# Altium PCB PCB3.PcbDoc
Units mil, origin at the board's own origin, x right, y up, seen from the top; angles counter-clockwise.
Board outline 730 x 1700 mil, 6 copper layers (Top Layer, Signal Layer Top, VCC, GND, Signal Layer Bottom, Bottom Layer), stack 32.112 mil thick; 25 components, 40 nets, 163 pads, 79 vias.
Unrouted connection lines stored in the file: 5.
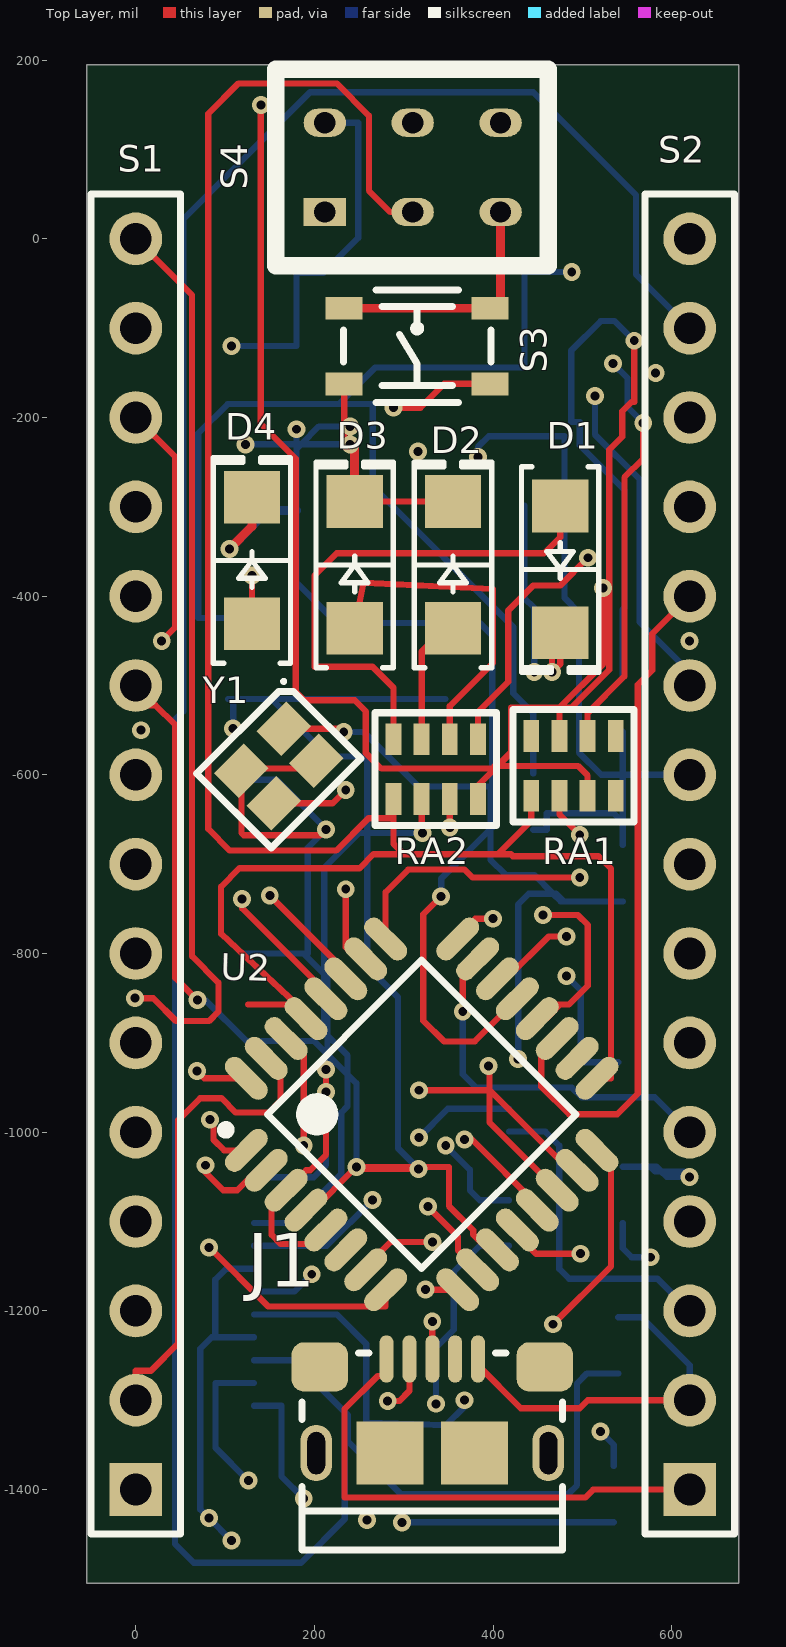
[diagram p0: Top Layer view]
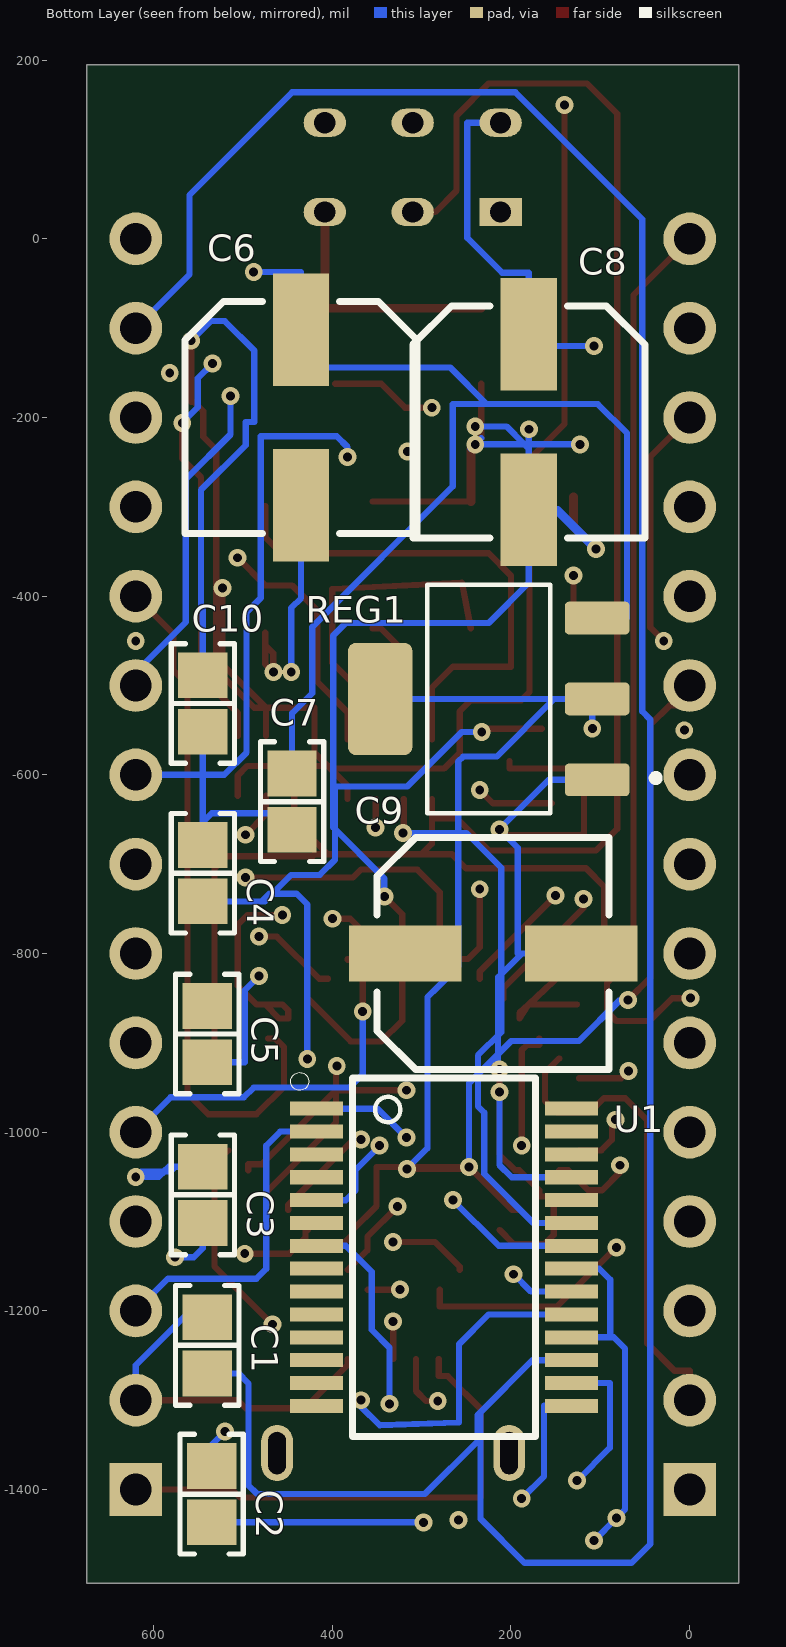
[diagram p1: Bottom Layer view, seen from below]
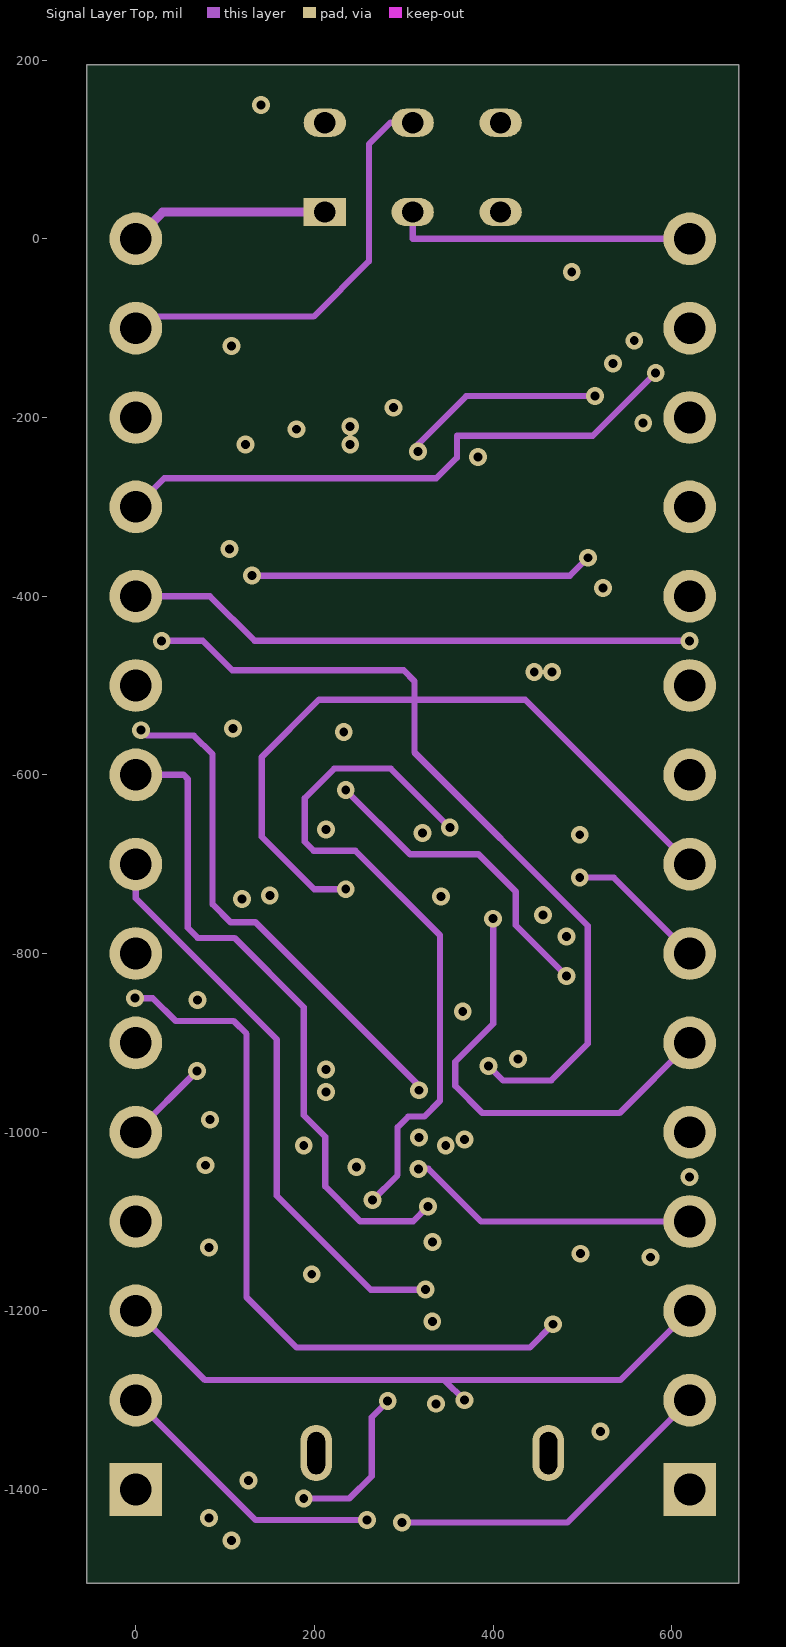
[diagram p2: Signal Layer Top]
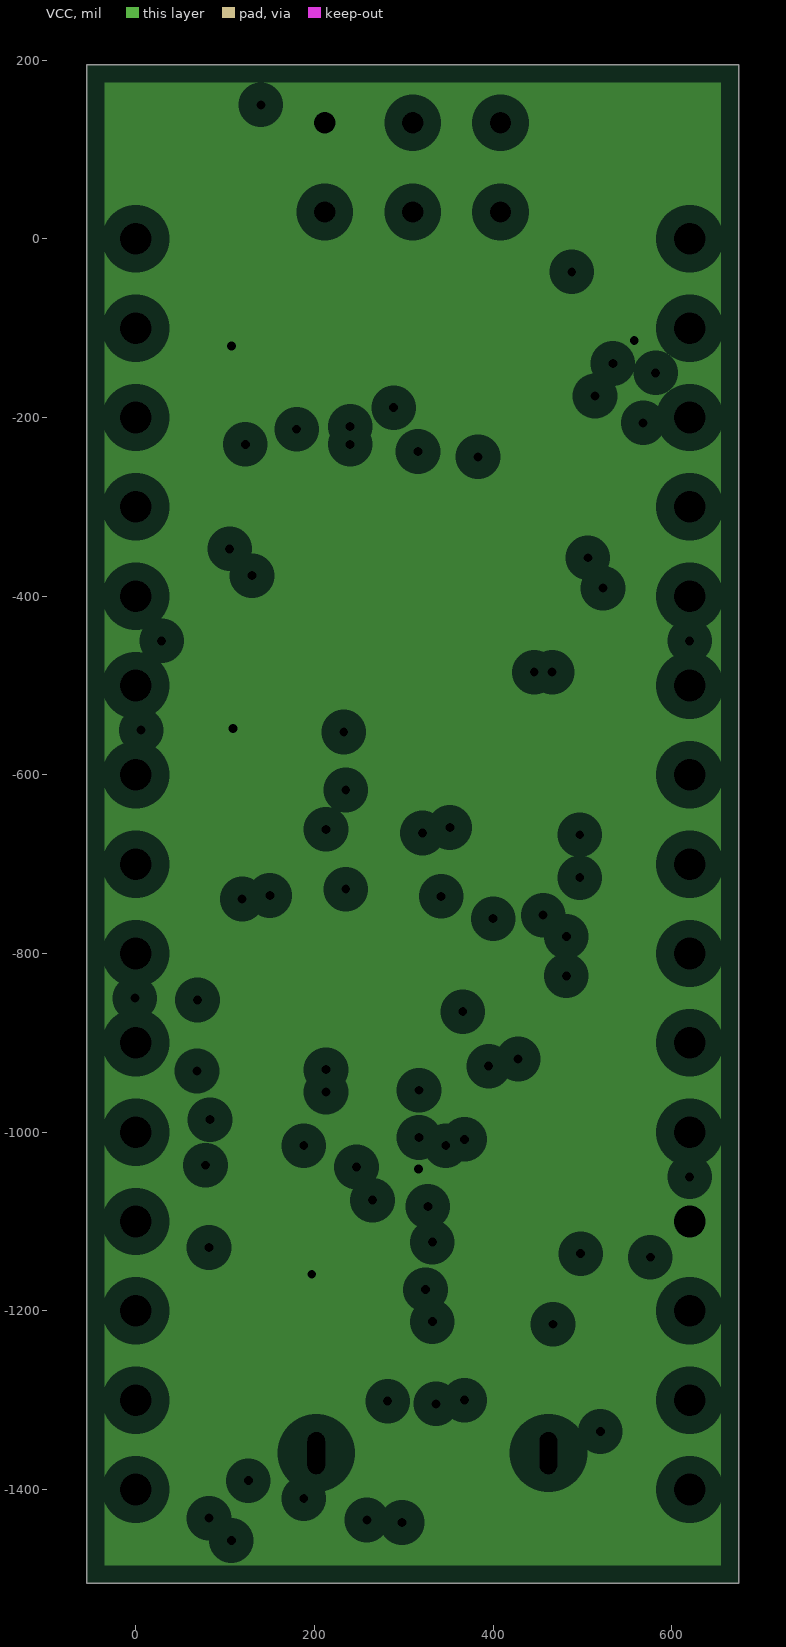
[diagram p3: VCC, clearances drawn from the general rule]
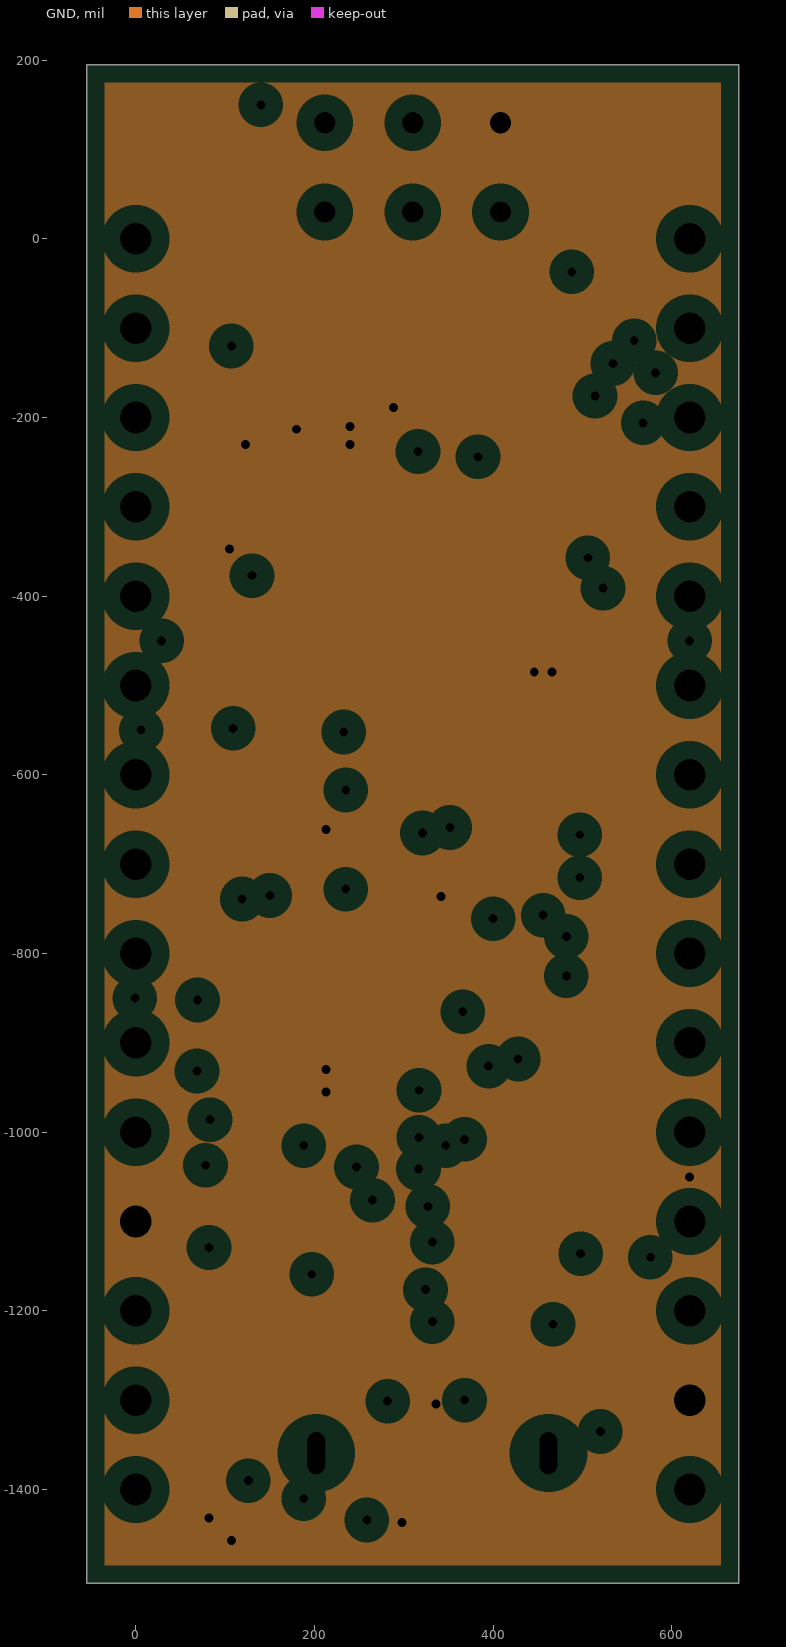
[diagram p4: GND, clearances drawn from the general rule]
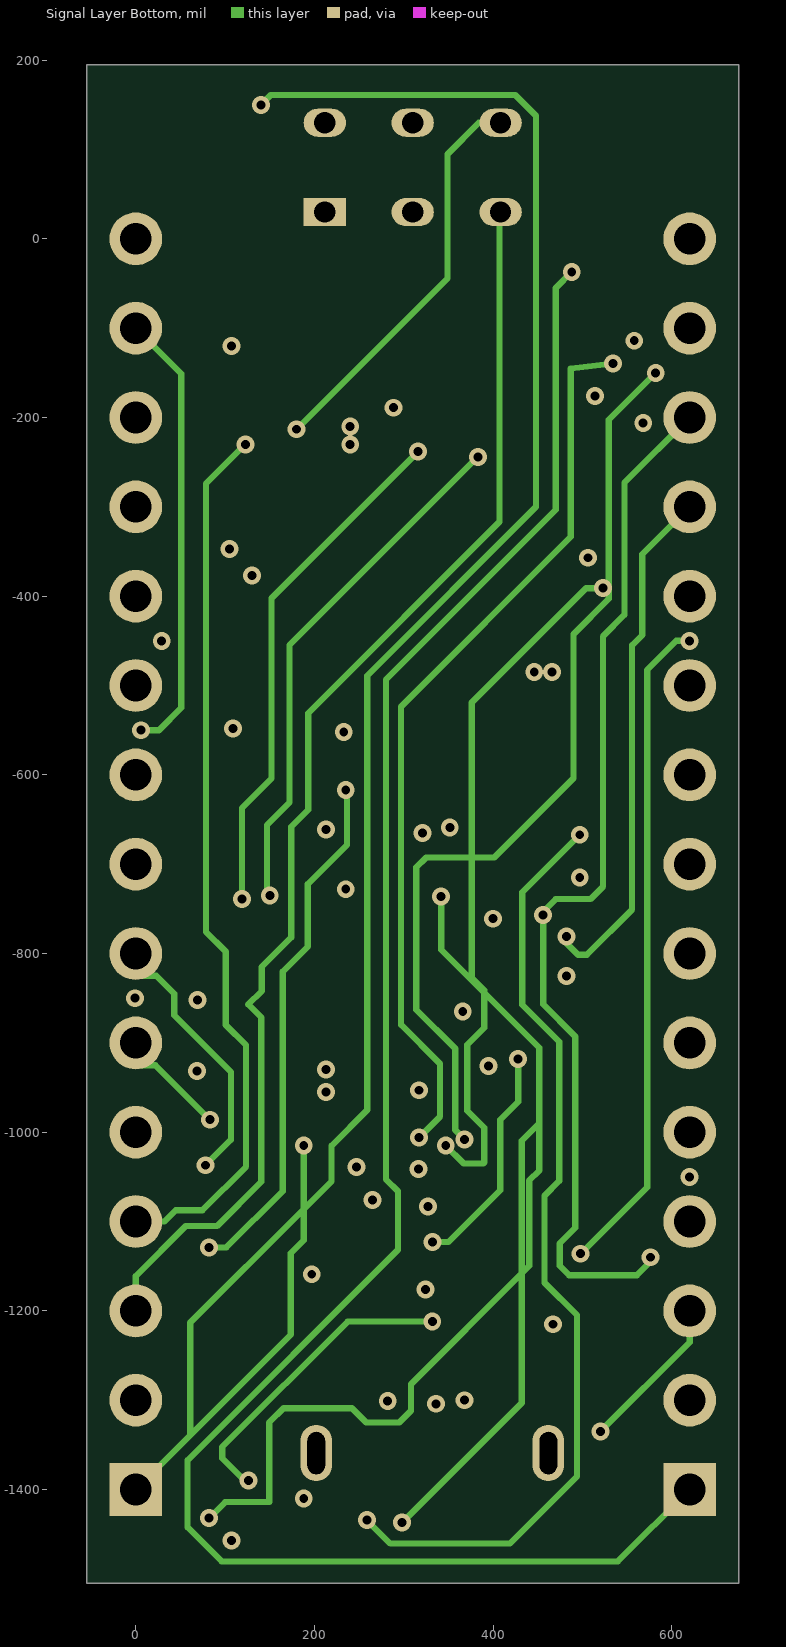
[diagram p5: Signal Layer Bottom]
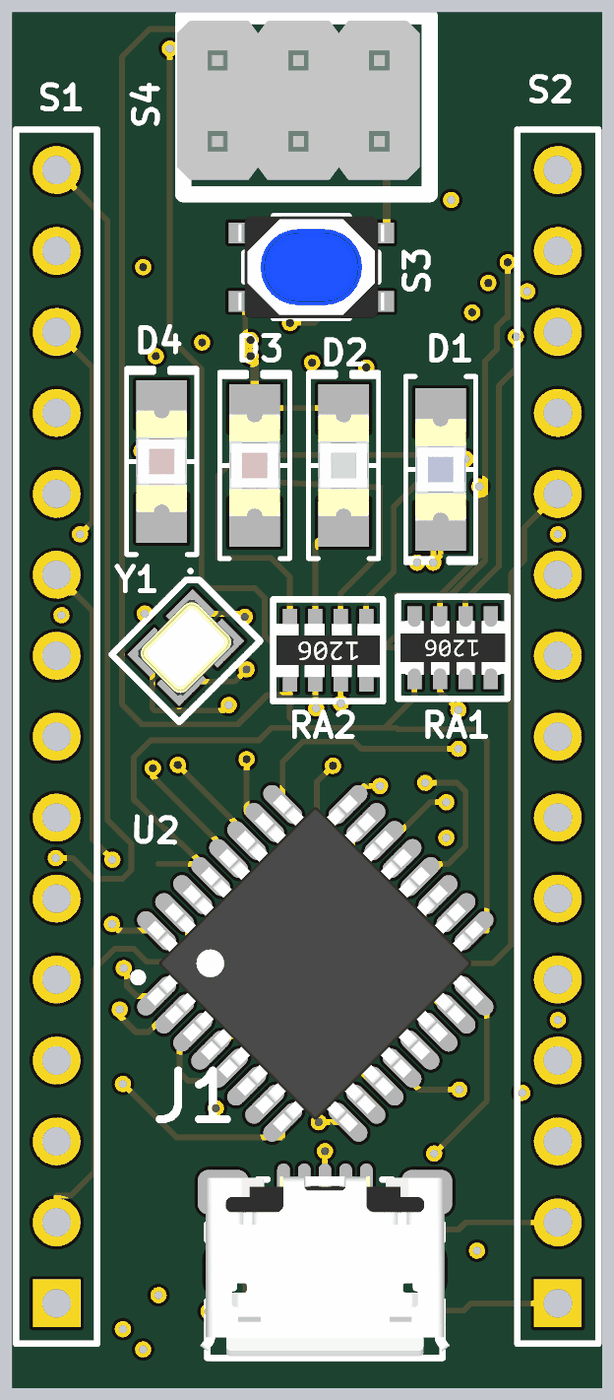
[diagram p6: 3D render of the assembled board from above, using the file's embedded part models]
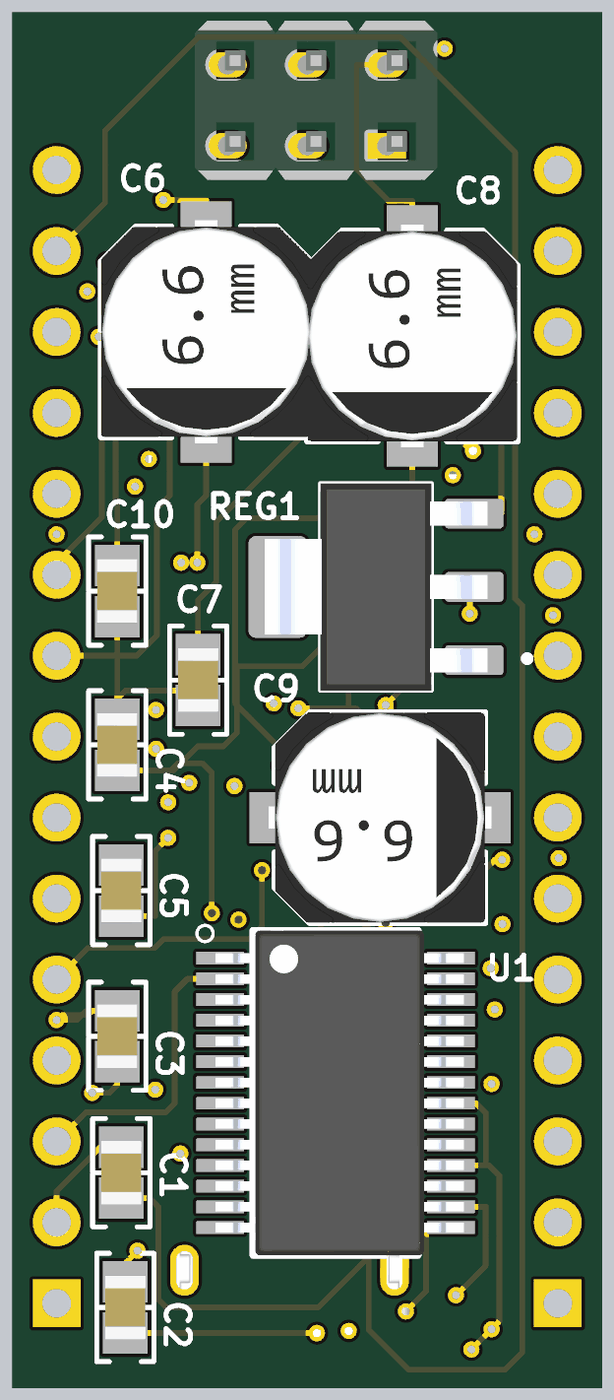
[diagram p7: 3D render of the assembled board from below, using the file's embedded part models]

## Layer stack, top to bottom
Top Solder: solder mask 0.4, Solder Resist, Dk 3.5
Top Layer: signal copper 1.4
Dielectric 2: prepreg 2.8, PP-006, Dk 4.1
Signal Layer Top: signal copper 1.378
Dielectric 4: prepreg 2.8, PP-006, Dk 4.1
VCC: plane copper 1.378, net +5V
Dielectric 1: dielectric 12.6, FR-4, Dk 4.8
GND: plane copper 1.378, net GND
Dielectric 5: prepreg 2.8, PP-006, Dk 4.1
Signal Layer Bottom: signal copper 1.378
Dielectric 3: prepreg 2.8, PP-006, Dk 4.1
Bottom Layer: signal copper 1.4
Bottom Solder: solder mask 0.4, Solder Resist, Dk 3.5

## Board outline
-55,-1505 -55,195 675,195 675,-1505

## Design rules (kind name [scope] priority, off if disabled: settings)
Clearance [All] p1: gap=10 ignorepadtopadclearanceinfootprint=FALSE except(0: Arc-Hole Track-Hole SMDPad-Hole THPad-Hole Via-Hole Fill-Hole Poly-Hole Region-Hole Text-Hole)
PlaneClearance [All] p1: clearance=20
PlaneConnect [All] p1: planeconnectstyle=Relief reliefexpansion=20 reliefentries=4 reliefconductorwidth=10 reliefairgap=10
PolygonConnect [All] p1: connectstyle=Relief reliefconductorwidth=10 reliefentries=4 polygonreliefangle="90 Angle" airgapwidth=10
RoomDefinition Sheet1 [InComponentClass('Sheet1')] p1: confinementstyle=ConfineOut formatcopy=TRUE lockcomponents=FALSE outline 4285,-1505 11445,-1505 11445,1030 4285,1030
RoutingVias [All] p1: holewidth=10 width=20 viastyle="Through Hole" minholewidth=10 minwidth=20 maxholewidth=10 maxwidth=20
SolderMaskExpansion [All] p1: expansion=4 istentingtop=FALSE
Width 7 [All] p1: maxlimit=10 minlimit=7 preferedwidth=7 minimp=50.000000 maximp=50.000000 favimp=50.000000
28 further rules are at their usual default settings.

## Components (designator, comment, footprint, x,y, rotation, side; value= is the part's Value field where it differs from the comment)
C1 "100nF/50V" "CAP 0805_2012" 540,-1238.62 r270 bottom value=0.1µF
C2 "100nF/50V" "CAP 0805_2012" 535,-1405.12 r270 bottom value=0.1µF
C3 "100nF/50V" "CAP 0805_2012" 545,-1070.12 r270 bottom value=0.1µF
C4 "33pF/50V" "CAP 0805_2012" 545,-710.12 r270 bottom value=18pF
C5 "18pF/50V" "CAP 0805_2012" 540,-890.12 r270 bottom value=18pF
C6 "47 µF" "CAP ALSMD 6.6MM H6.1MM" 435,-200 r270 bottom
C7 "100nF/50V" "CAP 0805_2012" 445,-630 r270 bottom value=0.1µF
C8 "47 µF" "CAP ALSMD 6.6MM H6.1MM" 180,-205 r270 bottom
C9 "47 µF" "CAP ALSMD 6.6MM H6.1MM" 220,-800 r180 bottom
C10 "100nF/50V" "CAP 0805_2012" 545,-520.12 r270 bottom value=0.1µF
D1 "Blue" "LED 1206_3216 BLUE" 475,-370 r270 top
D2 "Green" "LED 1206_3216 GREEN" 355,-365 r90 top
D3 "Red" "LED 1206_3216 RED" 245,-365 r90 top
D4 "Orange" "LED 1206_3216 RED" 130,-360 r90 top value=Red
J1 "10118193-0001LF" "FCI USB 10118193-0001LF" 331.92,-1357.2 r180 top
RA1 "1k +5% SMT Resistor Array" "RESNET 1206-8 CONCAVE" 490,-590 r90 top
RA2 "680E +5% SMT Resistor Array" "RESNET 1206-8 CONVEX" 335.75,-593.46 r90 top
REG1 "LM1117IMPX-5.0" SOT230P700X180-4N 225,-515 r0 bottom
S1 "Header 15" HDR1X15 0,-1400 r90 top
S2 "Header 15" HDR1X15 620,-1400 r90 top
S3 "PTS810 SJM 250 SMTR LFS" "C&K PTS810" 315,-120 r0 top
S4 "Programming Header Dual Row 3X2" "Header 3X2" 211.57,30 r90 top
U1 "FT232RL-REEL" SOP65P780X200-28N 275,-1140 r180 bottom
U2 "ATmega328/P" TQFP80P900X900X120-32N 320,-980 r45 top
Y1 "16 MHz" "NDK NX2520SA" 160,-590 r225 top

## Footprints (in the part's own frame and the unit in brackets; to place one, negate y for a bottom-side part, rotate by r counter-clockwise, add the part's x,y. Pads: shape width x height; smd on the part's side, far side on the other; paste and mask are expansions set on the pad)
"C&K PTS810" [mm] "T-Switch, 4-leads, body 4.2x3.2mm, C&K PTS810 SJM 250 SMTR LFS"
  rect 1.05x0.65 smd mask+0.1: 1(-2.075,1.075) 2(2.075,1.075) 3(-2.075,-1.075) 4(2.075,-1.075)
  silkscreen extent -2.1,-1.6 2.1,1.6, body extent -2.29,-1.6 2.29,1.6, height 2.7
"CAP 0805_2012" [mm] "Chip Capacitor, 2-Leads, Body 2.00x1.20mm, IPC Medium Density"
  rect 1.3x1.4 smd: 1(-0.8,0) 2(0.8,0)
  silkscreen extent -1.7,-0.9 1.7,0.9, body extent -1,-0.64 1,0.64, height 1.26
"CAP ALSMD 6.6MM H6.1MM" [mm] "Aluminum Electrolytic Capacitor, Body 6.60x6.60x6.10mm, IPC Low Density"
  rect 3.2x1.6 smd: 1(-2.5,0) 2(2.5,0)
  silkscreen extent -3.3,-3.3 3.3,3.3, body extent -3.5,-3.3 3.5,3.3, height 6.1
"FCI USB 10118193-0001LF" [mm] "USB 2.0 Type B Micro"
  oval 0.4x1.35 smd: 1(1.3,-2.625) 2(0.65,-2.625) 3(0,-2.625) 4(-0.65,-2.625) 5(-1.3,-2.625)
  oval 0.9x1.6 hole 0.5 slot 1.2 at 90 deg: S(-3.3,0.05) S(3.3,0.05)
  rrect50% 1.6x1.4 smd: S(-3.2,-2.4) S(3.2,-2.4)
  rect 1.9x1.8 smd: S(-1.2,0.05) S(1.2,0.05)
  silkscreen extent -3.7,-2.8 3.7,2.8, body extent -3.93,-2.9 3.93,2.76, height 2.78
HDR1X15 [mm] "Connector; Header; 15 Position"
  rect 1.5x1.5 hole 0.9: 1(0,0)
  round 1.5 hole 0.9: 2(2.54,0) 3(5.08,0) 4(7.62,0) 5(10.16,0) 6(12.7,0) 7(15.24,0) 8(17.78,0) 9(20.32,0) 10(22.86,0) 11(25.4,0) 12(27.94,0) 13(30.48,0) 14(33.02,0) 15(35.56,0)
  silkscreen extent -1.27,-1.27 36.83,1.27
"Header 3X2" [mm]
  rect 0.8x1.2 hole 0.6: 1(0,0)
  oval 0.8x1.2 hole 0.6: 2(2.54,0) 3(0,-2.5) 4(2.54,-2.5) 5(0,-5) 6(2.54,-5)
  silkscreen extent -1.52,-6.35 4.06,1.4, body extent -1.07,-6.03 3.93,1.59, height 7.25
"LED 1206_3216 BLUE" [mm] "Chip Diode, 2-Leads, Body 3.13x1.55mm, IPC Medium Density"
  rect 1.5x1.6 smd: 1(-1.8,0) 2(1.8,0)
  silkscreen extent -2.92,-1.1 2.92,1.1, body extent -1.6,-0.8 1.6,0.8, height 0.9
"LED 1206_3216 GREEN" [mm] "Chip Diode, 2-Leads, Body 3.13x1.55mm, IPC Medium Density"
  rect 1.5x1.6 smd: 1(-1.8,0) 2(1.8,0)
  silkscreen extent -2.92,-1.1 2.92,1.1, body extent -1.6,-0.8 1.6,0.8, height 0.9
"LED 1206_3216 RED" [mm] "Chip Diode, 2-Leads, Body 3.13x1.55mm, IPC Medium Density"
  rect 1.5x1.6 smd: 1(-1.8,0) 2(1.8,0)
  silkscreen extent -2.92,-1.1 2.92,1.1, body extent -1.6,-0.8 1.6,0.8, height 0.9
"NDK NX2520SA" [mm] "Crystal, 4-Leads, Body 2.00x2.50mm, Pitch 1.70mm, IPC Medium Density"
  rect 1.2x1 smd: 1(-0.85,-0.65) 2(0.85,-0.65) 3(0.85,0.65) 4(-0.85,0.65)
  silkscreen extent -1.85,-1.65 1.8,1.5, body extent -1.26,-1.01 1.26,1.01, height 0.5
"RESNET 1206-8 CONCAVE" [mm] "4 resistor 3.20x1.60mm, 0.7mm high"
  rect 0.9x0.45 smd: 1(-0.85,1.2) 2(-0.85,0.4) 3(-0.85,-0.4) 4(-0.85,-1.2) 5(0.85,-1.2) 6(0.85,-0.4) 7(0.85,0.4) 8(0.85,1.2)
  silkscreen extent -1.6,-1.73 1.6,1.73, body extent -0.85,-1.65 0.85,1.65, height 0.6
"RESNET 1206-8 CONVEX" [mm] "4 resistor 3.20x1.60mm, 0.7mm high"
  rect 0.9x0.45 smd: 1(-0.85,1.2) 2(-0.85,0.4) 3(-0.85,-0.4) 4(-0.85,-1.2) 5(0.85,-1.2) 6(0.85,-0.4) 7(0.85,0.4) 8(0.85,1.2)
  silkscreen extent -1.6,-1.73 1.6,1.73, body extent -0.84,-1.63 0.84,1.63, height 0.71
SOP65P780X200-28N [mm]
  rect 1.5x0.4 smd: 1(-3.625,4.225) 2(-3.625,3.575) 3(-3.625,2.925) 4(-3.625,2.275) 5(-3.625,1.625) 6(-3.625,0.975) 7(-3.625,0.325) 8(-3.625,-0.325) 9(-3.625,-0.975) 10(-3.625,-1.625) 11(-3.625,-2.275) 12(-3.625,-2.925) 13(-3.625,-3.575) 14(-3.625,-4.225) 15(3.625,-4.225) 16(3.625,-3.575) 17(3.625,-2.925) 18(3.625,-2.275) 19(3.625,-1.625) 20(3.625,-0.975) 21(3.625,-0.325) 22(3.625,0.325) 23(3.625,0.975) 24(3.625,1.625) 25(3.625,2.275) 26(3.625,2.925) 27(3.625,3.575) 28(3.625,4.225)
  silkscreen extent -4.35,-5.1 2.6,5.25, body extent -3.77,-5.1 4.03,5.1, height 2
SOT230P700X180-4N [mm]
  rrect25% 1.84x0.93 smd: 1(-3.085,2.3) 2(-3.085,0) 3(-3.085,-2.3)
  rrect25% 1.84x3.19 smd: 4(3.085,0)
  silkscreen extent -4.85,-3.25 1.75,3.25, body extent -3.5,-3.25 3.5,3.25, height 1.8
TQFP80P900X900X120-32N [mm] "TQFP, 32-Leads, Body 7.00x7.00mm, Pitch 0.80mm, IPC Medium Density"
  oval 1.5x0.55 smd: 1(-4.25,2.8) 2(-4.25,2) 3(-4.25,1.2) 4(-4.25,0.4) 5(-4.25,-0.4) 6(-4.25,-1.2) 7(-4.25,-2) 8(-4.25,-2.8) 17(4.25,-2.8) 18(4.25,-2) 19(4.25,-1.2) 20(4.25,-0.4) 21(4.25,0.4) 22(4.25,1.2) 23(4.25,2) 24(4.25,2.8)
  oval 0.55x1.5 smd: 9(-2.8,-4.25) 10(-2,-4.25) 11(-1.2,-4.25) 12(-0.4,-4.25) 13(0.4,-4.25) 14(1.2,-4.25) 15(2,-4.25) 16(2.8,-4.25) 25(2.8,4.25) 26(2,4.25) 27(1.2,4.25) 28(0.4,4.25) 29(-0.4,4.25) 30(-1.2,4.25) 31(-2,4.25) 32(-2.8,4.25)
  silkscreen extent -4.37,-3.1 3.1,3.75, body extent -4.5,-4.5 4.5,4.5, height 1.2

## Part data
C1 C2 C3 C7 C10: library part 08055D104KAT2A, "CAP CER 0.1UF 50V X5R 0805", Device Package="0805 (2012 Metric)", Manufacturer="AVX Corporation", Operating Temperature="-55°C ~ 85°C", Supplier Part Number 1=478-12790-1-ND, Temperature Coefficient=X5R, Tolerance=±10%, Voltage - Rated=50V, Applications="General Purpose", componentlink1description=Datasheet, componentlink1url=http://datasheets.avx.com/cx5r.pdf, componentlink2description="DigiKey Link", componentlink2url=http://digikey.com/product-detail/en/avx-corporation/08055D104KAT2A/478-12790-1-ND/9949330, lastupdated="2/9/2020 1:04:29 am", Lifecycle Status=Active, Minimum Order=1, Mounting Type="Surface Mount, MLCC", Package / Case="0805 (2012 Metric)", packaging=TapeAndReel, Part Number=08055D104KAT2A, Part Status=Active, partid=9440, price=0.02, series=-, Size / Dimension="0.079\" L x 0.049\" W (2.01mm x 1.25mm)", Supplier 1=DigiKey, Thickness (Max)="0.055\" (1.40mm)"
C4 C5: library part 08055A180JAT2A, "CAP CER 18PF 50V C0G/NP0 0805", Device Package="0805 (2012 Metric)", Manufacturer="AVX Corporation", Operating Temperature="-55°C ~ 125°C", Supplier Part Number 1=478-1307-1-ND, Temperature Coefficient="C0G, NP0", Tolerance=±5%, Voltage - Rated=50V, Applications="General Purpose", componentlink1description=Datasheet, componentlink1url=http://datasheets.avx.com/C0GNP0-Dielectric.pdf, componentlink2description="DigiKey Link", componentlink2url=http://digikey.com/product-detail/en/avx-corporation/08055A180JAT2A/478-1307-1-ND/564339, lastupdated="2/9/2020 1:04:40 am", Lifecycle Status=Active, Minimum Order=1, Mounting Type="Surface Mount, MLCC", Package / Case="0805 (2012 Metric)", packaging=TapeAndReel, Part Number=08055A180JAT2A, Part Status=Active, partid=3219, price=0.02, series=-, Size / Dimension="0.079\" L x 0.049\" W (2.01mm x 1.25mm)", Supplier 1=DigiKey, Thickness (Max)="0.037\" (0.94mm)"
C6 C8 C9: library part EMZA250ARA470MF61G, "CAP ALUM 47UF 20% 25V SMD", Lifetime @ Temp.="2000 Hrs @ 105°C", Manufacturer="United Chemi-Con", Operating Temperature="-55°C ~ 105°C", Ratings=AEC-Q200, Ripple Current @ High Frequency="240 mA @ 100 kHz", Ripple Current @ Low Frequency="96 mA @ 120 Hz", Supplier Part Number 1=565-EMZA250ARA470MF61GCT-ND, Tolerance=±20%, Voltage - Rated="25 V", Applications=Automotive, Capacitance="47 µF", componentlink1description=Datasheet, componentlink1url=https://www.chemi-con.co.jp/products/relatedfiles/capacitor/catalog/MZARA-e.PDF, componentlink2description="DigiKey Link", componentlink2url=https://www.digikey.com/en/products/detail/united-chemi-con/EMZA250ARA470MF61G/757193, Height - Seated (Max)="0.240\" (6.10mm)", Impedance="360 mOhms", lastupdated="3/6/2024 8:16:08 pm", Lifecycle Status=Active, Minimum Order=1, Mounting Type="Surface Mount", packaging=TapeAndReel, Part Number=EMZA250ARA470MF61G, Part Status=Active, partid=28020, Polarization=Polar, price=0.15, series="Alchip™- MZA", Size / Dimension="0.248\" Dia (6.30mm)", Supplier 1=DigiKey, Surface Mount Land Size="0.260\" L x 0.260\" W (6.60mm x 6.60mm)"
D1: library part APT3216QBC/D, "LED BLUE CLEAR CHIP SMD", Current - Test=20mA, Device Package="1206 (3216 Metric)", Lens Color=Colorless, Manufacturer=Kingbright, Millicandela Rating=100mcd, Supplier Device Package="Chip LED", Supplier Part Number 1=754-1439-1-ND, Voltage - Forward (Vf) (Typ)=3.3V, Color=Blue, componentlink1description=Datasheet, componentlink1url=http://www.kingbrightusa.com/images/catalog/SPEC/APT3216QBC-D.pdf, componentlink2description="DigiKey Link", componentlink2url=https://www.digikey.com/en/products/detail/kingbright/APT3216QBC-D/2163702, Configuration=Standard, Height (Max)=0.75mm, lastupdated="3/6/2024 7:58:07 pm", Lens Size="2.00mm x 1.60mm", Lens Style="Rectangle with Flat Top", Lens Transparency=Clear, Lifecycle Status=Active, Minimum Order=1, Mounting Type="Surface Mount", Package / Case="1206 (3216 Metric)", packaging=TapeAndReel, Part Number=APT3216QBC/D, Part Status=Active, partid=730, price=0.09, series=-, Size / Dimension="3.20mm L x 1.60mm W", Supplier 1=DigiKey, Viewing Angle=120°, Wavelength - Dominant=465nm, Wavelength - Peak=460nm
D2: library part 5976325607F, "LED GREEN 1206 SMD", Current - Test=20mA, Device Package="1206 (3216 Metric)", Lens Color=1.23mm, Manufacturer=Dialight, Supplier Device Package=1206, Supplier Part Number 1=350-4393-1-ND, Voltage - Forward (Vf) (Typ)=3.3V, Color=Green, componentlink1description=Datasheet, componentlink1url=//media.digikey.com/pdf/Data%20Sheets/Dialight%20PDFs/5976325607F.pdf, componentlink2description="DigiKey Link", componentlink2url=http://digikey.com/product-detail/en/dialight/5976325607F/350-4393-1-ND/9385499, Configuration=Standard, Height (Max)=1.23mm, lastupdated="2/9/2020 1:20:47 am", Lens Size="1.60mm Dia", Lens Style="Round with Domed Top", Lifecycle Status=Active, Minimum Order=1, Mounting Type="Surface Mount", Package / Case="1206 (3216 Metric)", packaging=TapeAndReel, Part Number=5976325607F, Part Status=Active, partid=533, price=0.28, series=597, Size / Dimension="3.20mm L x 1.60mm W", Supplier 1=DigiKey, Viewing Angle=70°, Wavelength - Peak=530nm
D3: library part 5990210007F, "LED RED 1206 SMD", Current - Test=20mA, Device Package="1206 (3216 Metric)", Lens Color=0.80mm, Manufacturer=Dialight, Millicandela Rating=29mcd, Supplier Device Package=1206, Supplier Part Number 1=350-4360-1-ND, Voltage - Forward (Vf) (Typ)=2.1V, Color=Red, componentlink1description=Datasheet, componentlink1url=http://www.dialightsignalsandcomponents.com/Assets/Brochures_And_Catalogs/Indication/CBI_SMD_new/Dialight_CBI_data_599-1206_Apr2018.pdf, componentlink2description="DigiKey Link", componentlink2url=https://www.digikey.com/en/products/detail/dialight/5990210007F/9385415, Configuration=Standard, Height (Max)=0.80mm, lastupdated="3/6/2024 8:00:41 pm", Lens Size="2.00mm x 1.60mm", Lens Style="Rectangle with Flat Top", Lifecycle Status=Active, Minimum Order=1, Mounting Type="Surface Mount", Package / Case="1206 (3216 Metric)", packaging=TapeAndReel, Part Number=5990210007F, Part Status=Active, partid=188, price=0.04, series=599, Size / Dimension="3.20mm L x 1.60mm W", Supplier 1=DigiKey, Viewing Angle=140°, Wavelength - Dominant=633nm
D4: library part 5990210007F, "LED RED 1206 SMD", Color=Red, Current - Test=20mA, Device Package="1206 (3216 Metric)", Lens Color=0.80mm, Manufacturer=Dialight, Millicandela Rating=29mcd, Supplier Device Package=1206, Supplier Part Number 1=350-4360-1-ND, Voltage - Forward (Vf) (Typ)=2.1V, componentlink1description=Datasheet, componentlink1url=http://www.dialightsignalsandcomponents.com/Assets/Brochures_And_Catalogs/Indication/CBI_SMD_new/Dialight_CBI_data_599-1206_Apr2018.pdf, componentlink2description="DigiKey Link", componentlink2url=https://www.digikey.com/en/products/detail/dialight/5990210007F/9385415, Configuration=Standard, Height (Max)=0.80mm, lastupdated="3/6/2024 8:00:41 pm", Lens Size="2.00mm x 1.60mm", Lens Style="Rectangle with Flat Top", Lifecycle Status=Active, Minimum Order=1, Mounting Type="Surface Mount", Package / Case="1206 (3216 Metric)", packaging=TapeAndReel, Part Number=5990210007F, Part Status=Active, partid=188, price=0.04, series=599, Size / Dimension="3.20mm L x 1.60mm W", Supplier 1=DigiKey, Viewing Angle=140°, Wavelength - Dominant=633nm
J1: "CONN RCPT USB2.0 MICRO B SMD R/A", Current Rating (Amps)="1.8A per Contact", Manufacturer="Amphenol ICC (FCI)", Operating Temperature="-30°C ~ 80°C", Supplier Part Number 1=609-4616-2-ND, Voltage - Rated=100VAC, componentlink1description=Datasheet, componentlink1url=https://cdn.amphenol-icc.com/media/wysiwyg/files/documentation/datasheet/inputoutput/io_usb_micro.pdf, componentlink2description="DigiKey Link", componentlink2url=//digikey.com/product-detail/en/amphenol-icc-fci/10118193-0001LF/609-4616-2-ND/2785388, Connector Type="USB - micro B", Features="Solder Retention", Gender=Receptacle, lastupdated="9/12/2019 8:51:28 pm", Lifecycle Status=0, Mating Cycles=10000, Minimum Order=1, Mounting Feature=Horizontal, Mounting Type="Surface Mount, Right Angle; Through Hole", Number of Contacts=5, Number of Ports=1, packaging=TapeAndReel, Part Number=10118193-0001LF, Part Status=Active, price=0.21, series=-, Shielding=Shielded, Specifications="USB 2.0", Supplier 1=DigiKey, Termination=Solder
RA1: library part TC164-JR-071KL, "RES ARRAY 4 RES 1K OHM 1206", Manufacturer=Yageo, Number of Resistors=4, Operating Temperature="-55°C ~ 155°C", Package / Case="1206 (3216 Metric), Concave, Long Side Terminals", Power Per Element=62.5mW, Resistance (Ohms)=1k, Supplier Part Number 1=TC164J-1.0KCT-ND, Temperature Coefficient=±200ppm/°C, Tolerance=±5%, Applications="DDRAM, SDRAM", Circuit Type=Isolated, componentlink1description=Datasheet, componentlink1url=https://www.yageo.com/upload/media/product/productsearch/datasheet/rchip/PYu-YC_TC_group_51_RoHS_L_9.pdf, componentlink2description="DigiKey Link", componentlink2url=http://digikey.com/product-detail/en/yageo/TC164-JR-071KL/TC164J-1.0KCT-ND/1005384, Height - Seated (Max)="0.028\" (0.70mm)", lastupdated="2/9/2020 1:23:31 am", Lifecycle Status=Active, Minimum Order=1, Mounting Type="Surface Mount", Number of Pins=8, packaging=TapeAndReel, Part Number=TC164-JR-071KL, Part Status=Active, partid=880, price=0.02, series=TC164, Size / Dimension="0.126\" L x 0.063\" W (3.20mm x 1.60mm)", Supplier 1=DigiKey
RA2: library part YC164-JR-07680RL, "RES ARRAY 4 RES 680 OHM 1206", Manufacturer=Yageo, Number of Resistors=4, Operating Temperature="-55°C ~ 155°C", Package / Case="1206 (3216 Metric), Convex, Long Side Terminals", Power Per Element=62.5mW, Resistance (Ohms)=680, Supplier Part Number 1=YC164J-680CT-ND, Temperature Coefficient=±200ppm/°C, Tolerance=±5%, Applications="DDRAM, SDRAM", Circuit Type=Isolated, componentlink1description=Datasheet, componentlink1url=https://www.yageo.com/upload/media/product/productsearch/datasheet/rchip/PYu-YC_TC_group_51_RoHS_L_9.pdf, componentlink2description="DigiKey Link", componentlink2url=http://digikey.com/product-detail/en/yageo/YC164-JR-07680RL/YC164J-680CT-ND/1005675, Height - Seated (Max)="0.028\" (0.70mm)", lastupdated="24/3/2022 2:30:41 pm", Lifecycle Status=Active, Minimum Order=1, Mounting Type="Surface Mount", Number of Pins=8, packaging=TapeAndReel, Part Number=YC164-JR-07680RL, Part Status=Active, partid=246, price=0.01, series=YC164, Size / Dimension="0.126\" L x 0.063\" W (3.20mm x 1.60mm)", Supplier 1=DigiKey
REG1: "800-mA/5V Linear Voltage Regulator", Package="SOT-223-4 Texas Instruments", Check_prices=https://www.snapeda.com/parts/LM1117IMPX-5.0/NOPB/Texas+Instruments/view-part/?ref=eda, MF="Texas Instruments", MP=LM1117IMPX-5.0/NOPB, SnapEDA_Link=https://www.snapeda.com/parts/LM1117IMPX-5.0/NOPB/Texas+Instruments/view-part/?ref=snap
S1 S2: "Header, 15-Pin", LatestRevisionDate=17-Jul-2002, LatestRevisionNote="Re-released for DXP Platform.", Publisher="Altium Limited"
S3: "SWITCH TACTILE SPST-NO 0.05A 16V", Contact Rating @ Voltage="0.05A @ 16VDC", Manufacturer=C&K, Operating Force=160gf, Operating Temperature="-40°C ~ 85°C", Supplier Part Number 1=CKN10502CT-ND, Actuator Height off PCB, Vertical=2.50mm, Actuator Orientation="Top Actuated", Actuator Type="Oval Button", Circuit=SPST-NO, componentlink1description=Datasheet, componentlink1url=https://dznh3ojzb2azq.cloudfront.net/products/Tactile/PTS810/documents/datasheet.pdf, componentlink2description="DigiKey Link", componentlink2url=http://digikey.com/product-detail/en/c-k/PTS810-SJM-250-SMTR-LFS/CKN10502CT-ND/4176673, Illumination=Non-Illuminated, lastupdated="9/4/2020 10:00:13 am", Lifecycle Status=Active, Minimum Order=1, Mounting Type="Surface Mount", Outline="4.20mm x 3.20mm", packaging=TapeAndReel, Part Number="PTS810 SJM 250 SMTR LFS", Part Status=Active, price=0.16, series=PTS810, Supplier 1=DigiKey, Switch Function=Off-Mom, Termination Style="J Lead"
S4: library part "Header 3X2"
U1: "USB Bridge, USB to UART USB 2.0 UART Interface 28-SSOP", Package="SSOP-28 FTDI", Availability="In Stock", Check_prices=https://www.snapeda.com/parts/FT232RL-REEL/FTDI%252C+Future+Technology+Devices+International+Ltd/view-part/?ref=eda, MF=FTDI,, MP=FT232RL-REEL, price=None, Purchase-URL=https://pricing.snapeda.com/search/part/FT232RL-REEL/?ref=eda, SnapEDA_Link=https://www.snapeda.com/parts/FT232RL-REEL/FTDI%252C+Future+Technology+Devices+International+Ltd/view-part/?ref=snap
Y1: library part NX2520SA-16.000000MHZ-W1, "CRYSTAL 16.0000MHZ 8PF SMD", ESR (Equivalent Series Resistance)="120 Ohms", Frequency Stability=±20ppm, Load Capacitance=8pF, Manufacturer="NDK America, Inc.", Operating Mode=Fundamental, Operating Temperature="-40°C ~ 85°C", Package / Case="4-SMD, No Lead", Supplier Part Number 1=644-1093-1-ND, componentlink1description=Datasheet, componentlink1url="//media.digikey.com/pdf/Data Sheets/NDK PDFs/NX2520SA-16.000000MHz-W1.pdf", componentlink2description="DigiKey Link", componentlink2url=https://www.digikey.com/en/products/detail/ndk-america-inc/NX2520SA-16-000000MHZ-W1/1468334, Frequency="16 MHz", Frequency Tolerance=±20ppm, Height - Seated (Max)="0.026\" (0.65mm)", lastupdated="3/6/2024 8:02:18 pm", Lifecycle Status=Active, Minimum Order=1, Mounting Type="Surface Mount", packaging=TapeAndReel, Part Number=NX2520SA-16.000000MHZ-W1, Part Status=Active, partid=523, price=0.77, series=NX2520SA, Size / Dimension="0.098\" L x 0.079\" W (2.50mm x 2.00mm)", Supplier 1=DigiKey, Type="MHz Crystal"
U2: componentlink1description=Datasheet, componentlink1url=https://datasheet.octopart.com/ATMEGA328-AU-Microchip-datasheet-65729177.pdf

## Via types
v1: diameter 20, hole 10, Top Layer to Bottom Layer, 79 vias

## Nets (pads, with @x,y where several pads share a name; then routed paths per layer and width w, separated by ;. In a path a pad name is that pad's centre, name@x,y a point inside that pad or via, vN(x,y) a via of type N, cw(c..) or ccw(c..) an arc to the next point about the centre after c; other vN are vias at no path point)
+3V3: C1.2 S2.14 U1.17 | length 3222.4
  Bottom Layer w7: U1.17 176,-1255.16 234,-1313.16 ; C1.2 505,-1270.12 493.94,-1281.18 493.94,-1395 483.94,-1405 296.49,-1405 237.26,-1345.77 237.26,-1316.42 234,-1313.16 ; S2.14 560,-40 560,49 445,164 195,164 53,22 53,-529 44,-538 44,-1461 65,-1482 185,-1482 234,-1433 234,-1313.16
+5V: C8.1 C9.1 C10.1 RA2.4 REG1.2 REG1.4 S2.4 S4.2 U1.4 U1.20 U2.4 U2.6 | length 2959.2
  Top Layer w7: U2.4 198.56,-1087.18 244.74,-1041 v1(316.5,-1041) ; RA2.4 382.99,-612 420,-574.99 420,-525 487.45,-525 530,-482.45 530,-236 544.5,-221.5 544.5,-193 555,-182.5 558,-182.5 v1(558,-114)
  Signal Layer Top w7: v1(316.5,-1041) 327.62,-1041 386.62,-1100 S2.4
  Bottom Layer w7: REG1.2 REG1.2@109,-515 ; v1(107,-120) 180,-120 C8.1 180,-38 210,-38 249,1 249,130 S4.2 ; v1(109,-548) REG1.2@109,-515 ; U1.20 177.61,-1178.39 v1(197,-1159) ; v1(316.5,-1041) 293.5,-1018 293.5,-848.9 281.51,-836.91 259,-814.4 259,-800 259,-585 253.5,-579.5 216,-579.5 151.5,-515 ; REG1.4 151.5,-515 ; C10.1 545,-414.84 547,-412.84 547,-281 497,-231 497,-204.93 487.5,-204.93 487.5,-125 520.5,-92 536,-92 v1(558,-114) ; REG1.2@109,-515 151.5,-515
A0: S2.5 U2.23 | length 423
  Top Layer w7: v1(366,-865) 366,-813 372,-807 382.64,-807 U2.23
  Bottom Layer w7: v1(366,-865) 366,-935 381,-950 488,-950 499,-961 581,-961 S2.5
A1: S2.6 U2.24 | length 563.2
  Top Layer w7: U2.24 360.37,-780.63 380,-761 v1(400,-761)
  Signal Layer Top w7: v1(400,-761) 400,-878.5 357.5,-921 357.5,-948.16 387.84,-978.5 541.5,-978.5 S2.6
A2: S2.7 U2.25 | length 442.2
  Top Layer w7: U2.25 279.63,-731.37 305,-706 368,-706 377,-715 v1(497,-715)
  Signal Layer Top w7: v1(497,-715) 535,-715 S2.7
A3: S2.8 U2.26 | length 882.1
  Top Layer w7: v1(235,-728) 235,-793 248.01,-806.01 U2.26
  Signal Layer Top w7: v1(235,-728) 199.73,-728 141,-669.27 141,-580 205,-516 436,-516 S2.8
A4: S2.9 U2.27 | length 1326.5
  Top Layer w7: v1(150,-735) 235.09,-820.09 U2.27
  Signal Layer Bottom w7: v1(150,-735) 147,-732 147,-656 172,-631 172,-455 v1(383,-244)
  Bottom Layer w7: v1(383,-244) 383,-233 395,-221 480,-221 480,-402 496,-418 496,-575 521,-600 S2.9
A5: S2.10 U2.28 | length 1331.7
  Top Layer w7: v1(119,-739) 119,-749.27 208.73,-839 208.73,-850.55 U2.28
  Signal Layer Top w7: v1(316,-238) 316,-230 370,-176 v1(514,-176)
  Signal Layer Bottom w7: v1(119,-739) 119,-637 152,-604 152,-402 v1(316,-238)
  Bottom Layer w7: v1(514,-176) 514,-219 564,-269 564,-429 620,-485 S2.10
A6: S2.11 U2.19 | length 777.2
  Top Layer w7: U2.19 463.91,-895.09 454,-905 454,-949 485,-980 539,-980 562,-957 562,-499 578,-483 578,-442 S2.11
A7: S2.12 U2.22 | length 681.1
  Top Layer w7: U2.22 414.72,-828.28 462,-781 v1(482,-781)
  Signal Layer Bottom w7: v1(482,-781) 482,-788.23 495,-801.23 505,-801.23 555.5,-750.73 555.5,-455 567,-443.5 567,-353 S2.12
AREF: C3.2 S2.13 U2.20 | length 1474.9
  Top Layer w7: v1(456,-757) 495,-757 506,-768 506,-836 485,-857 475,-857 ; 475,-857 456,-857 449.45,-863.55 U2.20 459.18,-872.82 475,-857
  Signal Layer Bottom w7: v1(576,-1140) 576,-1145 561,-1160 485,-1160 474.5,-1149.5 474.5,-1124.5 492,-1107 492,-892.84 456,-856.84 v1(456,-757) 456,-753 470,-739 509,-739 523,-725 523,-445 547,-421 547,-273 S2.13
  Bottom Layer w7: C3.2 545,-1130 555,-1140 v1(576,-1140)
D0: RA1.3 S1.1 U2.30 | length 3649.6
  Top Layer w7: v1(140,150) 140,-207 179.18,-246.18 179.18,-507.18 188.46,-516.46 245,-516.46 257.5,-528.96 257.5,-575.5 275,-593 399,-593 402,-590 495,-590 505.75,-600.75 RA1.3 ; U2.30 168.28,-902 182,-902 188,-908 v1(188,-1015)
  Signal Layer Bottom w7: S1.1 61,-1339 ; v1(140,150) 151,161 425,161 448,138 448,-300 259,-489 259,-975.14 219.14,-1015 219.14,-1054.86 188,-1086 ; v1(188,-1015) 188,-1086 ; 61,-1339 173.5,-1226.5 173.5,-1135.5 188,-1121 188,-1086 ; 61,-1339 61,-1213 188,-1086
D1: RA1.2 S1.2 U2.31 | length 1962.6
  Top Layer w7: S1.2 0,-1267 17,-1267 47.56,-1236.44 47.56,-986.44 72,-962 96,-962 112,-978 149,-978 162,-965 162,-933.35 U2.31 ; RA1.2 474.25,-644.25 v1(497,-667)
  Signal Layer Top w7: S1.2 134.17,-1434.17 v1(258.67,-1434.17)
  Signal Layer Bottom w7: v1(258.67,-1434.17) 285,-1460.5 418.5,-1460.5 494,-1385 494,-1205 457.5,-1168.5 457.5,-1071 473.94,-1054.56 473.94,-898.83 432.5,-857.39 432.5,-731.5 v1(497,-667)
D2: S1.5 U2.32 | length 155.5
  Top Layer w7: v1(68.52,-931.48) 76.67,-939.63 U2.32
  Signal Layer Top w7: S1.5 v1(68.52,-931.48)
D3: S1.6 U2.1 | length 202.8
  Top Layer w7: v1(83,-986) 84,-985 87,-985 87,-1008.37 99,-1020.37 U2.1
  Signal Layer Bottom w7: S1.6 0,-925 22,-925 v1(83,-986)
D4: S1.7 U2.2 | length 399.9
  Top Layer w7: v1(78,-1037) 78,-1045 98,-1065 113.51,-1065 135.87,-1042.64 U2.2
  Signal Layer Bottom w7: S1.7 0,-825 23,-825 43,-845 43,-869 106.5,-932.5 106.5,-1008.5 v1(78,-1037)
D5: S1.8 U2.9 | length 682.6
  Top Layer w7: v1(324.26,-1176.26) U2.9
  Signal Layer Top w7: S1.8 0,-738.24 157.89,-896.13 157.89,-1071.17 262.98,-1176.26 v1(324.26,-1176.26)
D6: S1.9 U2.10 | length 835.7
  Top Layer w7: v1(327,-1083.17) 360.69,-1116.85 360.69,-1132.04 U2.10
  Signal Layer Top w7: S1.9 53.5,-600 58.16,-604.66 58.16,-771.16 69.5,-782.5 110.5,-782.5 188,-860 188,-981 212,-1005 212,-1060.7 251,-1099.7 310.46,-1099.7 v1(327,-1083.17)
D7: S1.10 U2.11 | length 928.7
  Top Layer w7: S1.10 0,-522 22,-522 44,-544 44,-827 v1(69,-852) ; v1(247,-1039) 350.5,-1039 350.5,-1082.63 377.69,-1109.81 377.69,-1114.63 394.77,-1131.72 U2.11
  Bottom Layer w7: v1(69,-852) 78,-852 124,-898 200,-898 247,-945 v1(247,-1039)
D8: S1.11 U2.12 | length 1472.9
  Top Layer w7: U2.12 430,-1109.45 430,-1118 448,-1136 v1(498,-1136)
  Signal Layer Top w7: S1.11 83,-400 133,-450 v1(620,-450)
  Signal Layer Bottom w7: v1(498,-1136) 572.5,-1061.5 572.5,-482.5 605,-450 v1(620,-450)
D9: S1.12 U2.13 | length 1812.2
  Top Layer w7: v1(368,-1008) 376,-1008 449.45,-1081.45 U2.13
  Signal Layer Top w7: S1.12 31.89,-268.11 336.39,-268.11 359.5,-245 359.5,-220.5 511.5,-220.5 v1(582,-150)
  Signal Layer Bottom w7: v1(368,-1008) 357.5,-997.5 357.5,-906.33 314,-862.83 314,-703.5 325,-692.5 401.34,-692.5 490,-603.84 490,-442.49 529.5,-402.99 529.5,-202.5 v1(582,-150)
D10: S1.13 U2.14 | length 1368.3
  Top Layer w7: S1.13 44,-244 44,-435 v1(29,-450) ; v1(395,-926) 396,-926 396,-989.19 U2.14
  Signal Layer Top w7: v1(29,-450) 75,-450 108,-483 300,-483 312,-495 312,-575 506,-769 506,-901 465,-942 411,-942 v1(395,-926)
D11: S1.14 S4.4 U2.15 | length 1780.8
  Top Layer w7: v1(317,-953) 396,-953 479,-1036 493.99,-1036 U2.15
  Signal Layer Top w7: S1.14 13,-87 199,-87 261,-25 261,106 285,130 S4.4 ; v1(6,-550) 12,-556 65,-556 86,-577 86,-745 106,-765 134,-765 317,-948 v1(317,-953)
  Signal Layer Bottom w7: S1.14 51,-151 51,-525 26,-550 v1(6,-550)
D12: S1.15 S4.1 U2.16 | length 2277.4
  Top Layer w7: v1(-1,-850) 19.5,-850 45,-875.5 82,-875.5 92.5,-865 92.5,-832.63 63,-803.13 63,-63 S1.15 ; v1(467,-1215) 532,-1150 532,-1036.1 U2.16
  Signal Layer Top w7: v1(-1,-850) 19,-850 44.5,-875.5 109.5,-875.5 124,-890 124,-1185 180.08,-1241.08 440.92,-1241.08 v1(467,-1215)
  Signal Layer Top w10: S1.15 30,30 S4.1
D13: RA2.1 S2.15 S4.3 U2.17 | length 2280.6
  Top Layer w7: RA2.1 288.5,-648.5 ; S4.3 285,30 261,54 261,138 225,174 115,174 81,140 81,-660.5 105.25,-684.75 224.25,-684.75 260.5,-648.5 288.5,-648.5 ; U2.17 532,-939.63 532,-705 518,-691 422,-691 420,-689 300.42,-689 288.5,-677.08 288.5,-648.5
  Signal Layer Top w7: S4.3 310,0 S2.15
GND: C1.1 C2.2 C3.1 C4.1 C5.1 C6.2 C7.2 C8.2 C9.2 C10.2 D1.2 D2.2 D3.2 D4.2 J1.5 REG1.1 S1.4 S2.2 S3.3 S3.4 S4.6 U1.7 U1.18 U1.21 U1.25 U2.3 U2.5 U2.21 Y1.2 Y1.4 | length 8441.2
  Top Layer w7: Y1.4 201.76,-592.81 121,-592.81 Y1.2 118.24,-665 120.97,-667.73 206.27,-667.73 v1(213,-661) ; U2.5 197.27,-1125 162,-1125 152,-1115 152,-1072 168.28,-1072 U2.3 190.62,-1042.57 195.43,-1042.57 213,-1025 v1(213,-955) v1(213,-929.97) ; S3.3 233.31,-210 233.31,-223.31 v1(240,-230) v1@245,-235 ; D3.2 245,-294 355,-294 D2.2 ; v1(288.65,-189) 318.59,-189 345.26,-162.32 S3.4 ; v1(341.79,-736) 321.79,-756 321.79,-875.18 345,-898.38 379.35,-898.38 U2.21 ; J1.5 383.1,-1261.08 431.02,-1309 497,-1309 506,-1300 S2.2 ; D1.2 D1.2@475,-455 ; D1.2@475,-455 475,-476 v1(466,-485) 466,-464 D1.2@475,-455
  Top Layer w10: v1(105,-347) 130,-322 D4.2 ; D3.2@245,-294 v1@245,-235
  Signal Layer Top w7: v1(298.08,-1437) 483,-1437 S2.2
  Signal Layer Bottom w7: S1.4 32,-1100 44.63,-1087.37 74.63,-1087.37 123.5,-1038.49 123.5,-902.76 100.73,-879.98 100.73,-797.73 78.5,-775.5 78.5,-274.16 v1(122.66,-230) ; v1(82,-1432) 100,-1414 149.5,-1414 149.5,-1324.81 165.37,-1308.94 242.06,-1308.94 258.07,-1324.96 295,-1324.96 308.04,-1311.92 308.04,-1281.96 432,-1158 ; v1(180,-213.16) 349,-44.16 349,95 384,130 S4.6 ; v1(298.08,-1437) 432,-1303.08 432,-1302.69 ; v1(298.08,-1436.61) 432,-1302.69 ; v1(341.79,-736) 341.79,-795.66 451.5,-905.36 451.5,-990 ; 432,-1302.69 432,-1158 ; 432,-1158 432,-1009.5 451.5,-990 ; 432,-1158 440.5,-1149.5 440.5,-1054 451.5,-1043 451.5,-990
  Bottom Layer w7: REG1.1 157.55,-605.55 v1(213,-661) 192.5,-681.5 192.5,-800 188,-800 ; v1(107,-1457) v1(82,-1432) 72.25,-1422.25 72.25,-1242.31 85,-1229.57 89,-1229.57 ; C9.2 188,-800 ; v1(122.66,-230) 180,-230 ; U1.18 89,-1229.57 ; U1.21 101.2,-1152.8 89,-1165 89,-1229.57 ; U1.25 199.24,-1050.43 213,-1036.68 v1(213,-955) ; v1(180,-213.16) 180,-230 ; v1(213,-929.97) 214.47,-928.5 214.47,-826.47 188,-800 ; v1@233.31,-223.31 v1(240,-230) ; v1(240,-210) 205,-210 185,-230 ; v1@245,-235 v1(240,-230) ; v1(298.08,-1436.61) C2.2 ; v1(336,-1304) 336,-1241.18 356,-1221.18 356,-1156.2 385,-1127.2 U1.7 ; v1(341.79,-736) 341.79,-716 399,-658.79 399,-444 385,-430 225,-430 180,-385 180,-304 C8.2 180,-235 ; C6.2 435,-402.08 446,-413.08 v1(446,-485) ; C7.2 460,-661.5 460,-643 535,-643 545,-653 ; C1.1 566.27,-1207.13 620,-1260.85 S2.2 ; C3.1 576,-1038.62 ; C4.1 545,-653 ; C10.2 545,-653 ; 180,-235 185,-230 ; 180,-235 180,-230 ; 180,-230 185,-230 ; 185,-230 v1(240,-230) ; 576,-1038.62 583,-1038.62 588.38,-1044 ; 576,-1038.62 581.38,-1044 588.38,-1044 ; 588.38,-1044 594.38,-1050 v1(620,-1050) 614,-1044 588.38,-1044
  Bottom Layer w10: v1(105,-347) 148,-304 C8.2@180,-304
"GREEN TX": RA2.3 U1.22 | length 971.5
  Top Layer w7: v1(351.5,-659) RA2.3
  Signal Layer Top w7: v1(265,-1076) 293,-1048 293,-994.5 305,-982.5 323,-982.5 340.5,-965 340.5,-779.61 245.89,-685 199,-685 189,-675 189,-626 222,-593 285.5,-593 v1(351.5,-659)
  Bottom Layer w7: U1.22 213.8,-1127.2 v1(265,-1076)
NetC4_2: C4.2 U2.7 Y1.1 | length 1084.9
  Top Layer w7: Y1.1 229,-548.24 v1(232.76,-552) ; U2.7 257.36,-1150.64 285,-1123 v1(332,-1123)
  Signal Layer Bottom w7: v1(332,-1123) 350,-1123 408,-1065 408,-986 428,-966 v1(428,-918)
  Bottom Layer w7: v1(232.76,-552) 255,-552 316,-613 397,-613 397,-695 414,-712 446,-712 467,-733 ; v1(428,-918) 428,-745 440,-733 467,-733 ; C4.2 479,-741.61 ; 467,-733 475.61,-741.61 479,-741.61 ; 467,-733 470.39,-733 479,-741.61
NetC5_2: C5.2 U2.8 Y1.3 | length 1418.9
  Top Layer w7: v1(82,-1129) 148,-1195 279.63,-1195 U2.8 ; Y1.3 220.24,-631.76 v1(235,-617)
  Signal Layer Top w7: v1(235,-617) 306.97,-688.97 383.63,-688.97 425.25,-730.59 425.25,-768.25 v1(482,-825)
  Signal Layer Bottom w7: v1(82,-1129) 101.45,-1129 164.5,-1065.95 164.5,-820.2 192.5,-792.2 192.5,-722.28 236.5,-678.28 236.5,-618.5 v1(235,-617)
  Bottom Layer w7: v1(482,-825) 498,-841 498,-921.61 C5.2
NetD1_1: D1.1 RA2.8 | length 585.4
  Top Layer w7: RA2.8 288.5,-502.5 265,-479 200,-479 200,-377 225,-352 457,-352 475,-334 D1.1
NetD2_1: D2.1 RA2.7 | length 143.9
  Top Layer w7: RA2.7 320,-461.8 345.94,-435.87 D2.1
NetD3_1: D3.1 RA2.6 | length 385.1
  Top Layer w7: D3.1 255,-385 400,-392 400,-474.5 351.5,-523 RA2.6
NetD4_1: D4.1 RA2.5 | length 709.7
  Top Layer w7: D4.1 v1(130,-377) ; RA2.5 382.99,-529.9 417,-495.89 417,-416 445,-388 475,-388 v1(506,-357)
  Signal Layer Top w7: v1(130,-377) 486,-377 v1(506,-357)
NetJ1_2: J1.2 U1.15 | length 387.4
  Top Layer w7: v1(282,-1301) 295,-1301 306.33,-1289.67 J1.2
  Signal Layer Top w7: v1(188,-1410) 239,-1410 264,-1385 264,-1319 v1(282,-1301)
  Bottom Layer w7: U1.15 163,-1306.34 163,-1385 v1(188,-1410)
NetJ1_3: J1.3 U1.16 | length 555
  Top Layer w7: J1.3 v1(331.92,-1212)
  Signal Layer Bottom w7: v1(126,-1390) 121.75,-1390 96.75,-1365 96.75,-1352.29 237.04,-1212 v1(331.92,-1212)
  Bottom Layer w7: v1(126,-1390) 89.25,-1353.25 89.25,-1280.75 U1.16
"RED RX": RA2.2 U1.23 | length 641.4
  Top Layer w7: RA2.2 320,-664 v1(321,-665)
  Bottom Layer w7: U1.23 175,-1101.61 230,-1046.61 230,-978 237,-971 237,-914 211,-888 211,-704 250,-665 v1(321,-665)
RESET: C2.1 RA1.1 S1.3 S2.3 S3.1 S3.2 S4.5 U1.2 U1.19 U2.29 | length 4039.9
  Top Layer w7: 126,-857 U2.29@180.33,-857 ; RA1.1 442.76,-651.49 405.25,-689 266,-689 250.5,-704.5 116,-704.5 95.5,-725 95.5,-777.77 U2.29@180.33,-857 ; U2.29@180.33,-857 190.55,-866.55 U2.29 U2.29@180.33,-857
  Top Layer w10: S3.1 S3.2 408.43,-77.68 S4.5
  Signal Layer Top w7: S1.3 77.5,-1277.5 345.5,-1277.5 ; v1(368,-1300) 345.5,-1277.5 ; S2.3 542.5,-1277.5 345.5,-1277.5
  Signal Layer Bottom w7: S1.3 0,-1161 56,-1105 90.99,-1105 140.5,-1055.49 140.5,-871.48 126.01,-856.99 141,-842 141,-815 174,-782 174,-658 193,-639 193,-530.96 407,-316.96 407,30 S4.5 ; v1(520,-1335) 620,-1235 S2.3
  Bottom Layer w7: U1.19 225,-1203.98 258.07,-1237.05 258.07,-1324.96 347,-1328 368,-1307 v1(368,-1300) ; U1.2 458.25,-999.25 474,-1015 474,-1153 485,-1164 584,-1164 S2.3 ; v1(520,-1335) 535,-1350 C2.1
RX: RA1.6 U1.1 | length 1585.8
  Top Layer w7: RA1.6 505.75,-530.75 547,-489.5 547,-267 568,-246 v1(568,-206)
  Signal Layer Bottom w7: v1(317,-1006) 340.5,-982.5 340.5,-923.33 297,-879.83 297,-523.5 487,-333.5 487,-145 v1(534,-139.5)
  Bottom Layer w7: v1(317,-1006) 349.34,-973.66 U1.1 ; v1(534,-139.5) 550.5,-156 550.5,-188.5 v1(568,-206)
TX: RA1.7 U1.5 | length 1083.5
  Top Layer w7: RA1.7 474.25,-525 523,-476.25 v1(523,-391)
  Signal Layer Bottom w7: v1(347,-1015) 367,-1035 389,-1035 390,-1034 390,-995 371,-976 371,-902 390,-883 390,-841 376,-827 376,-519 504,-391 v1(523,-391)
  Bottom Layer w7: v1(347,-1015) 374,-1042 374,-1065.02 385,-1076.02 U1.5
VUSB: C6.1 C7.1 J1.1 REG1.3 S2.1 | length 4098.4
  Top Layer w7: J1.1 280.74,-1273 270.57,-1273 233.57,-1310 233.57,-1409 503,-1409 512,-1400 S2.1
  Signal Layer Bottom w7: v1(488,-37) 470,-55 470,-303.3 280,-493.3 280,-1052.7 293.5,-1066.2 293.5,-1131.5 58,-1367 58,-1442.41 96.09,-1480.5 539.5,-1480.5 S2.1
  Bottom Layer w7: REG1.3 70.03,-424.45 70.03,-217.73 102.75,-185 227,-185 ; C7.1 445,-531 422.5,-508.5 422.5,-434.5 265.15,-277.15 265.15,-185.21 264.94,-185 227,-185 ; v1(488,-37) 435,-37 C6.1 435,-144 268,-144 227,-185
pads on no net: J1.4 J1.S RA1.4 RA1.5 RA1.8 U1.3 U1.6 U1.8 U1.9 U1.10 U1.11 U1.12 U1.13 U1.14 U1.24 U1.26 U1.27 U1.28 U2.18

## Polygon pours and split planes (outlines as drawn)
+5V on VCC (split plane): 654.9,-1484.9 -34.9,-1484.9 -34.9,174.9 654.9,174.9
GND on GND (split plane): 654.9,-1484.9 -34.9,-1484.9 -34.9,174.9 654.9,174.9

## Silkscreen, mask and mechanical layers (free items; w line width, h text height)
Mechanical 1:
  the board outline again, w6